# Altium PCB BACK-LIGHT.PcbDoc
Units mm, origin at the board's own origin, x right, y up, seen from the top; angles counter-clockwise.
Board outline 91 x 91 mm, 2 copper layers (Top Layer, Bottom Layer), stack 1.571 mm thick; 36 components, 34 nets, 79 pads, 6 vias.
Unrouted connection lines stored in the file: 1.
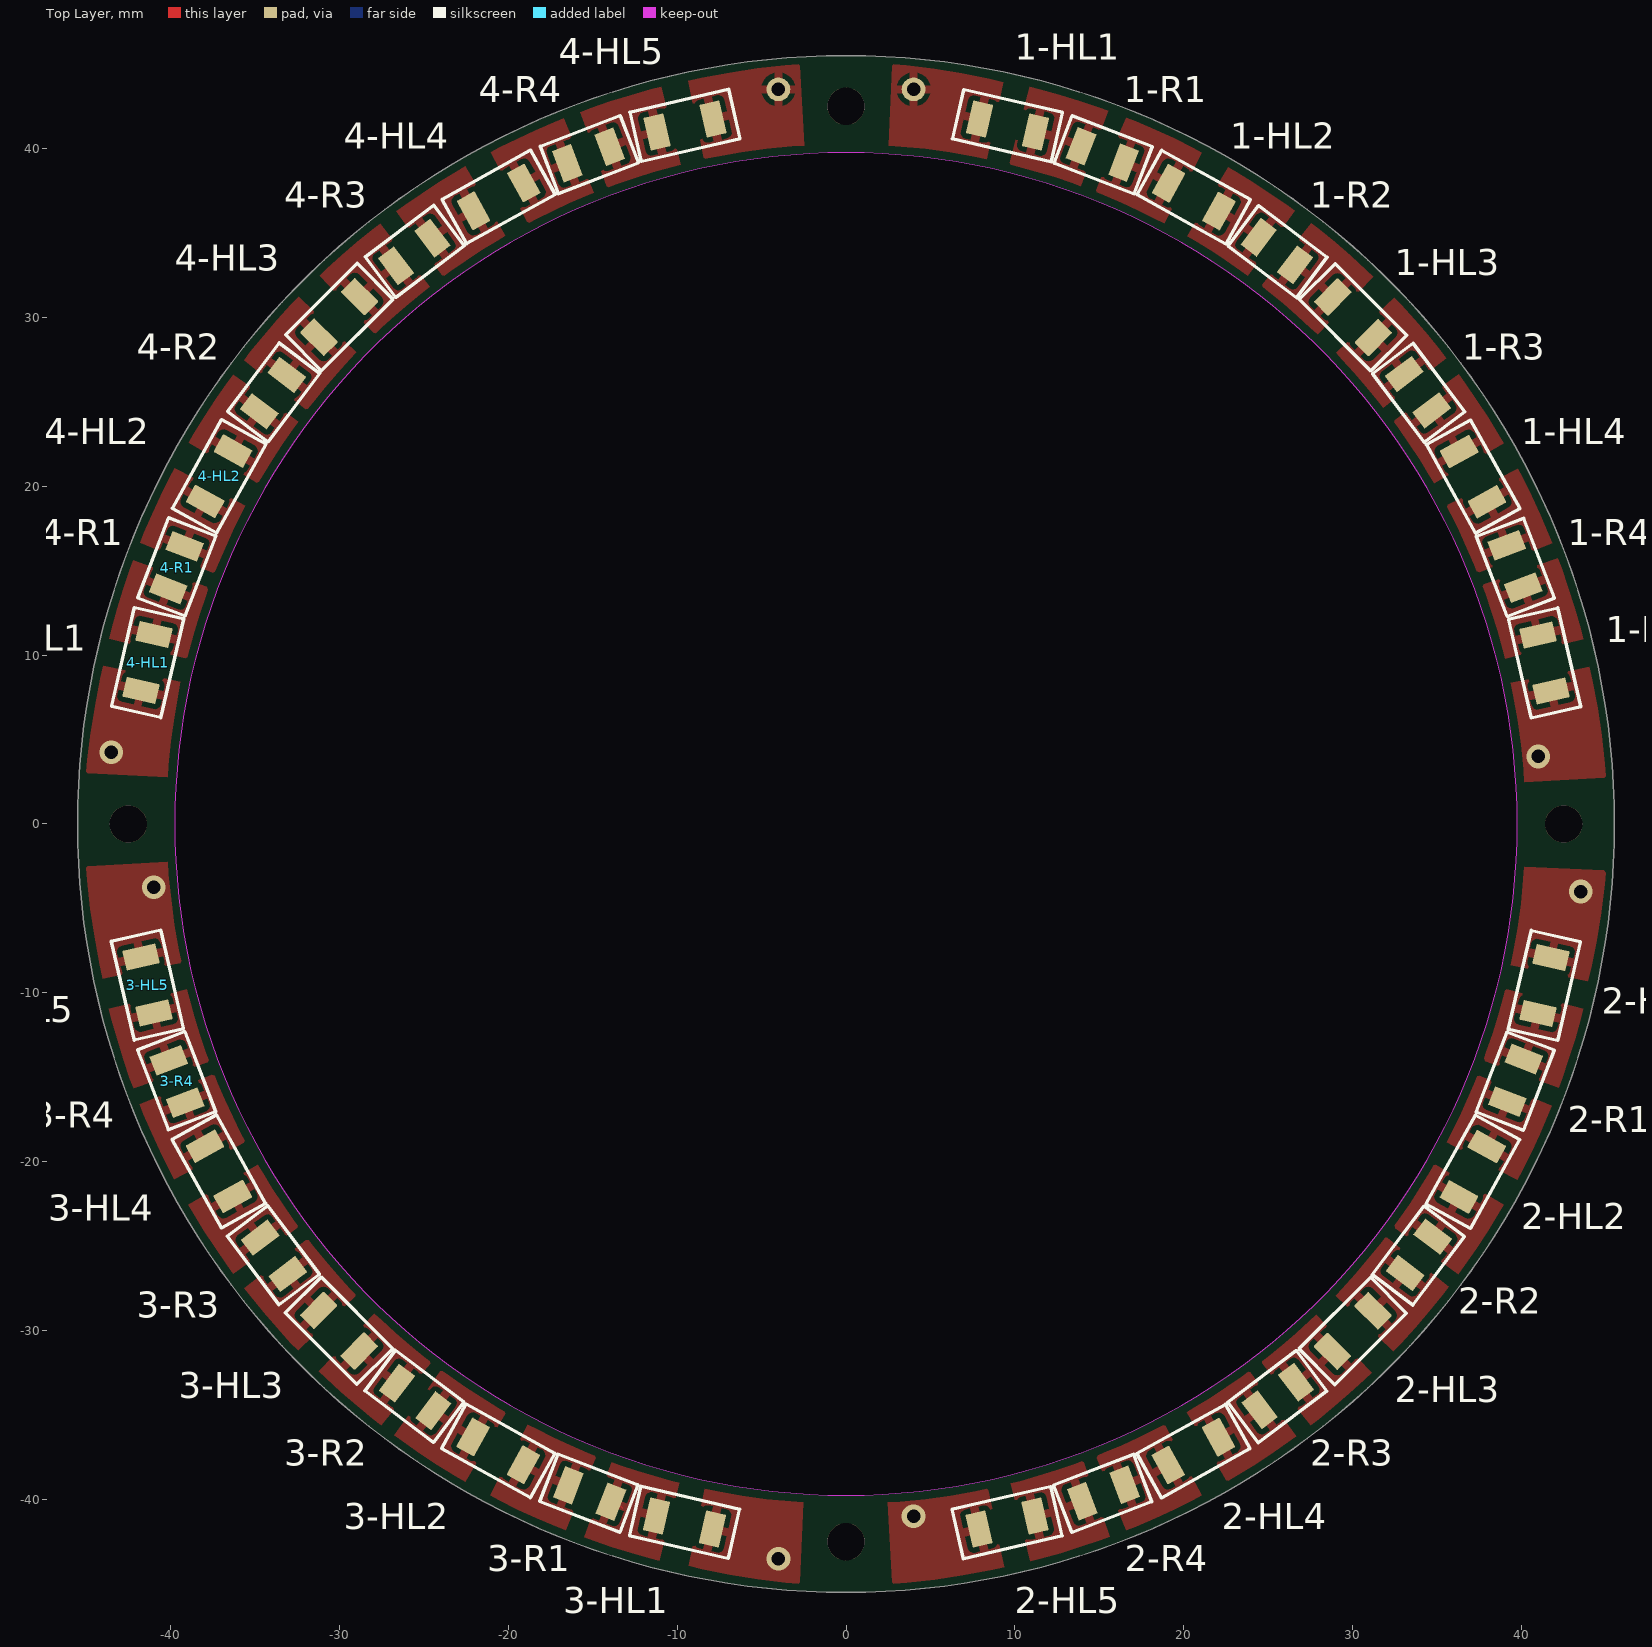
[diagram p0: Top Layer view]
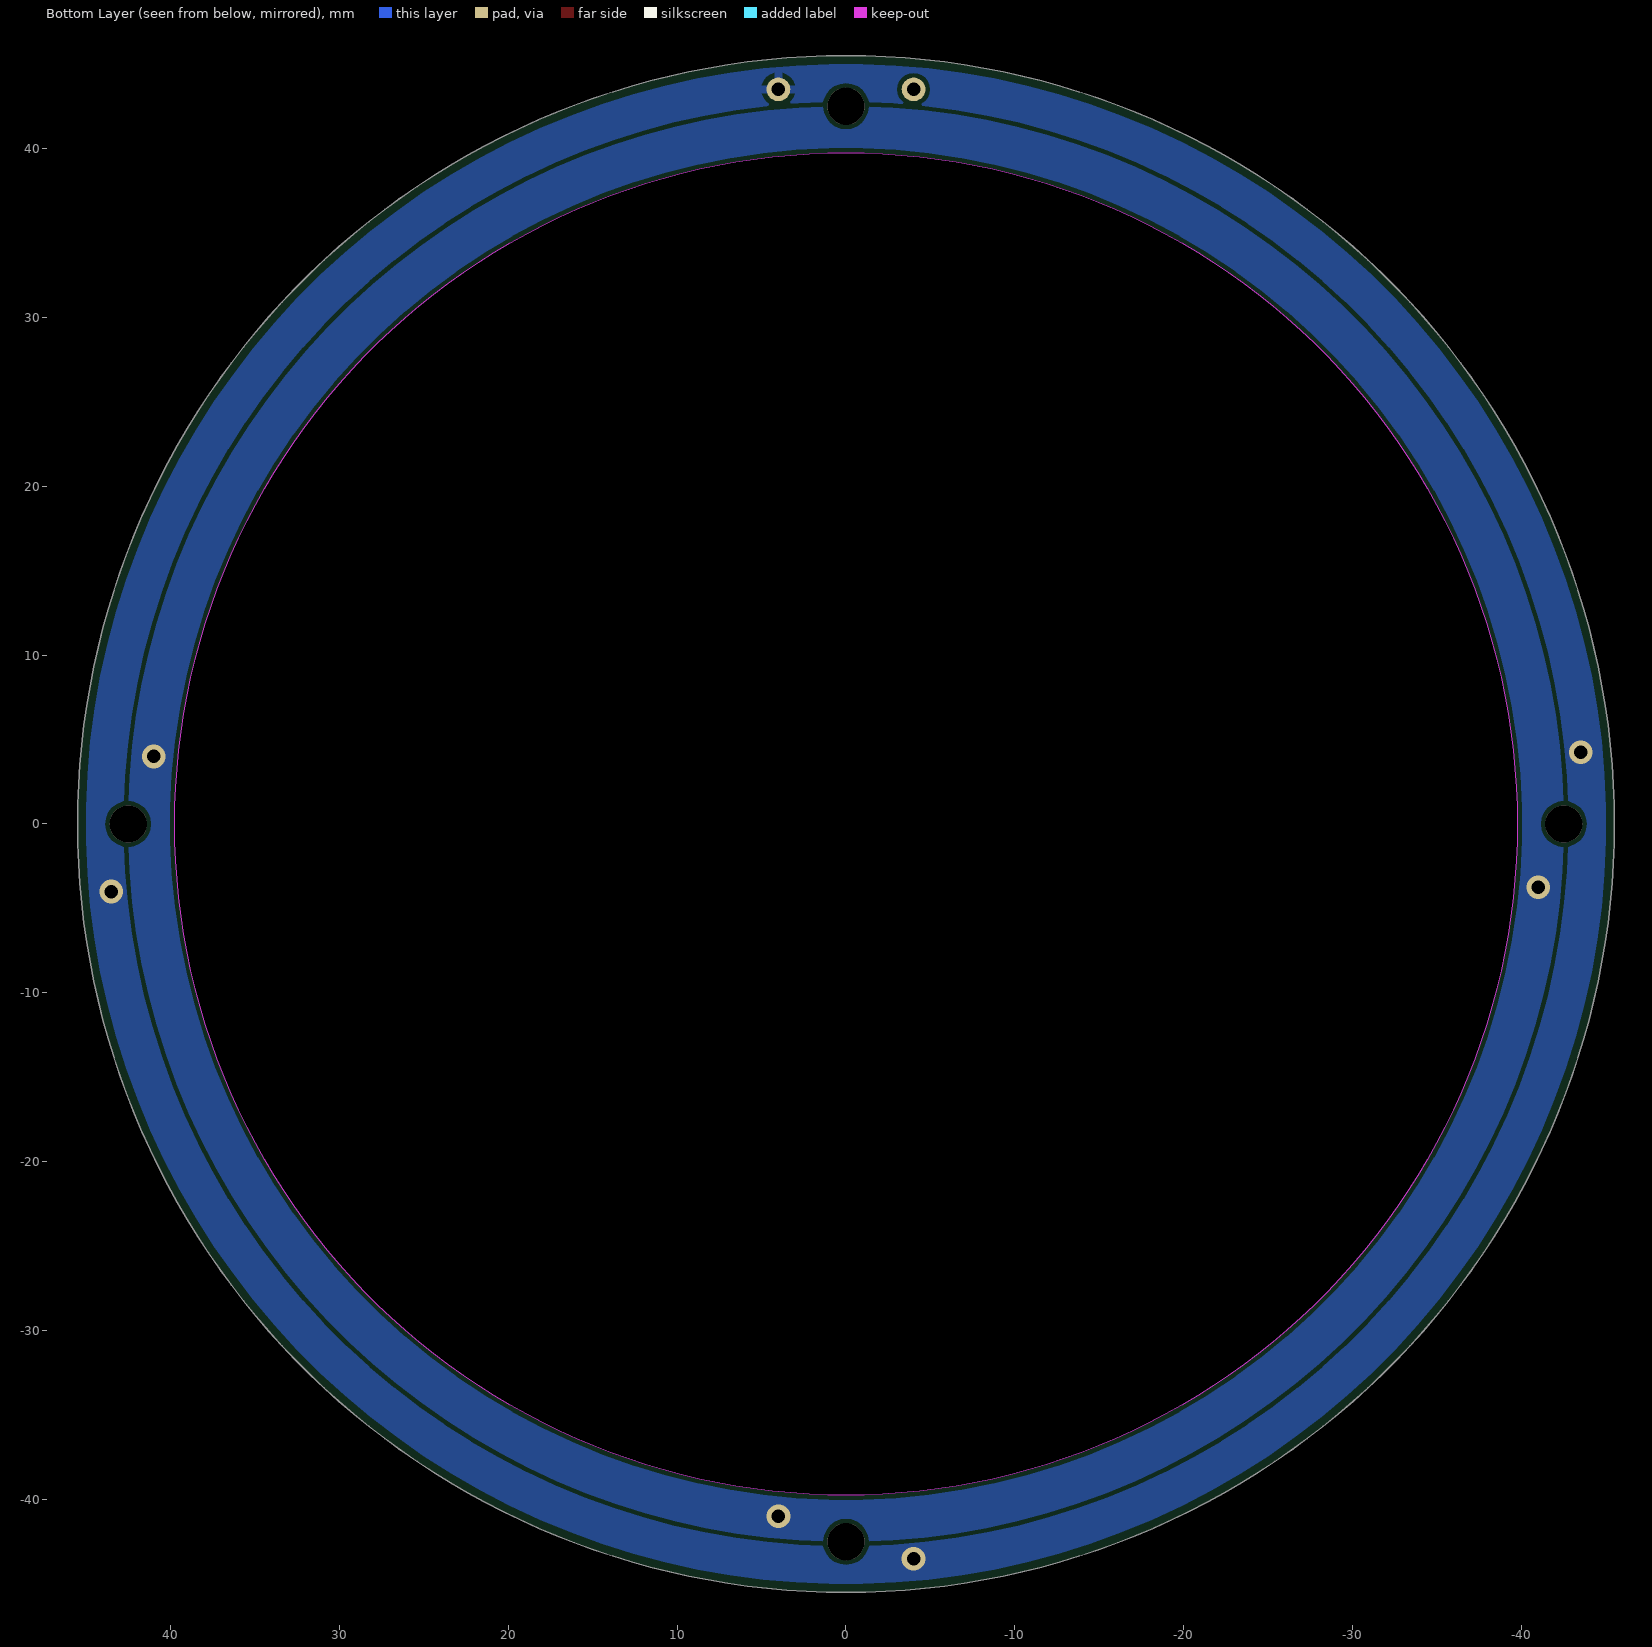
[diagram p1: Bottom Layer view, seen from below]
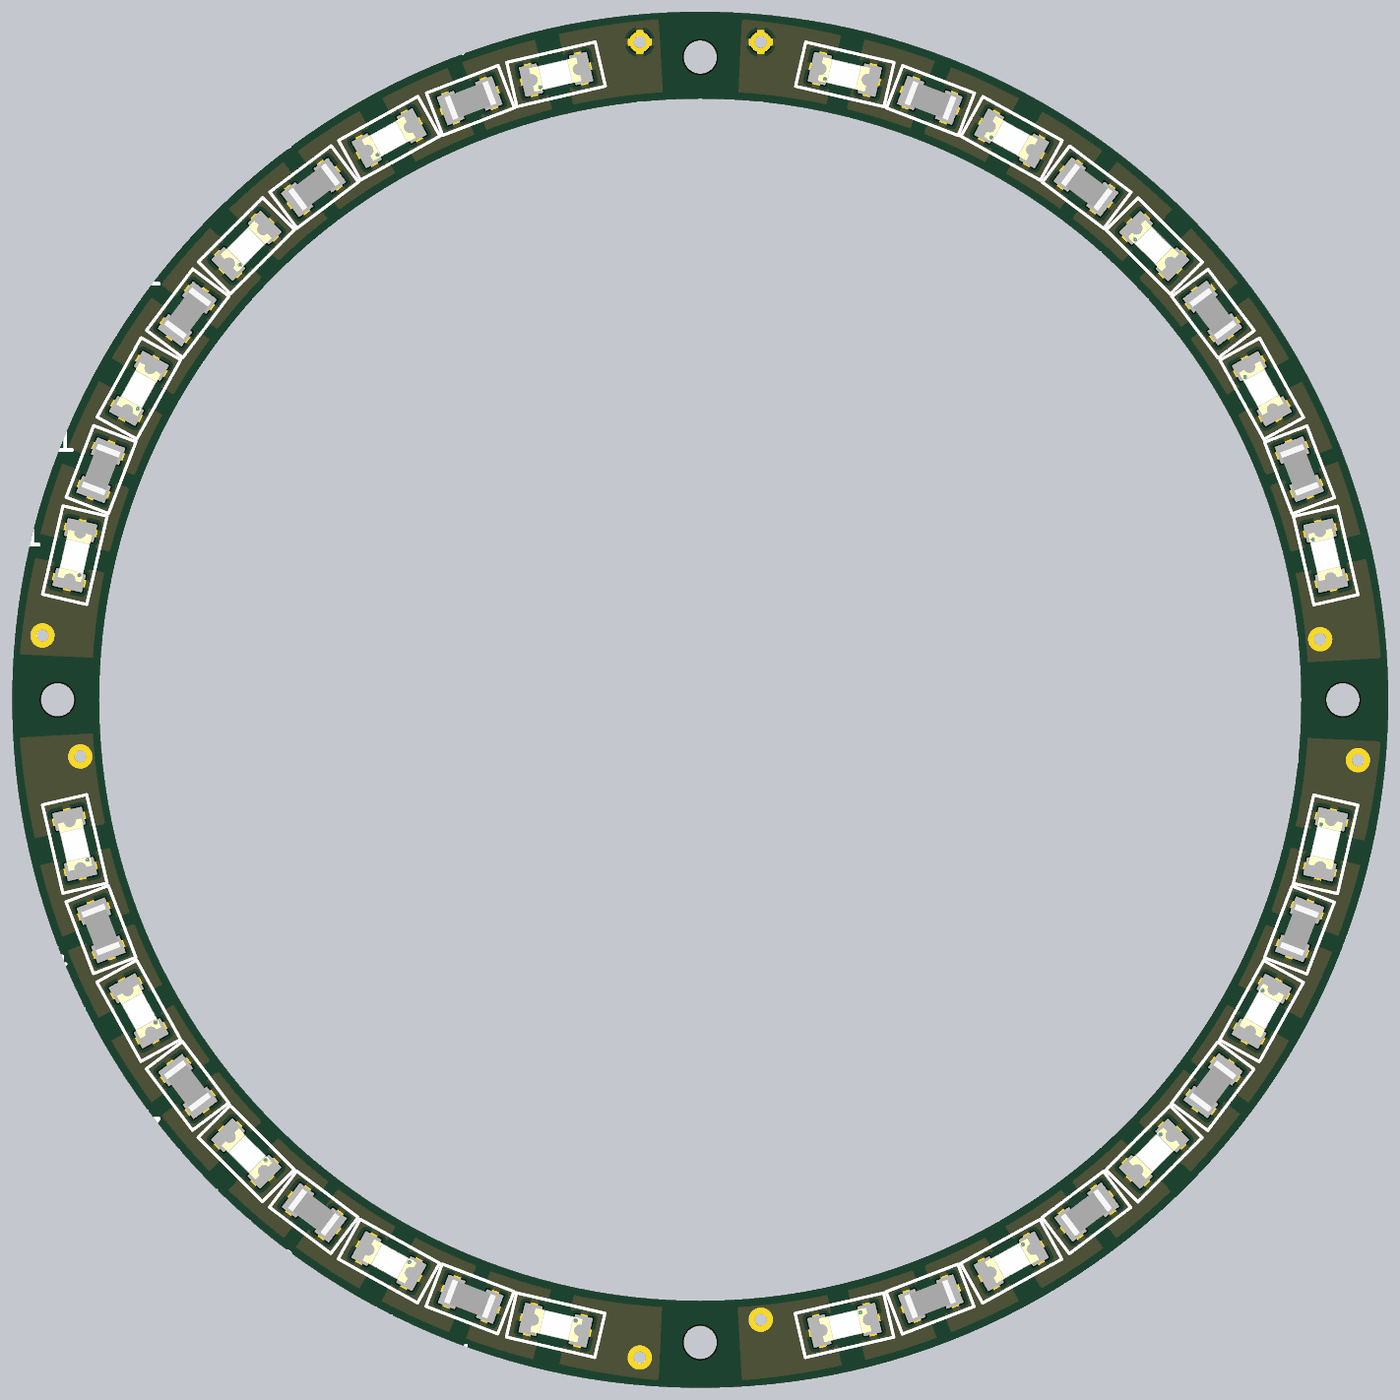
[diagram p2: 3D render of the assembled board from above, using the file's embedded part models]

## Layer stack, top to bottom
Top Solder: solder mask 0.0102, Solder Resist, Dk 3.5
Top Layer: signal copper 0.0356
Dielectric 1: dielectric 1.5, FR-4, Dk 4.8
Bottom Layer: signal copper 0.0356
Bottom Solder: solder mask 0.0102, Solder Resist, Dk 3.5

## Board outline
-45.5,0 ccw(c0,0) 0,-45.5 ccw(c0,0) 45.5,0 ccw(c0,0) 0,45.5 ccw(c0,0)
cut-out: -39.75,0 ccw(c0,0) 0,-39.75 ccw(c0,0) 39.75,0 ccw(c0,0) 0,39.75 ccw(c0,0)

## Design rules (kind name [scope] priority, off if disabled: settings)
Clearance [All] p1: gap=0.254 ignorepadtopadclearanceinfootprint=FALSE except(0: Arc-Hole Track-Hole SMDPad-Hole THPad-Hole Via-Hole Fill-Hole Poly-Hole Region-Hole Text-Hole)
PlaneConnect [All] p1: planeconnectstyle=Direct reliefexpansion=0.508 reliefentries=4 reliefconductorwidth=0.254 reliefairgap=0.254
PolygonConnect PolygonConnect_1 [ISVIA] p1: connectstyle=Direct reliefconductorwidth=0.254 reliefentries=4 polygonreliefangle="90 Angle" airgapwidth=0.254
PolygonConnect [All] p2: connectstyle=Relief reliefconductorwidth=0.5 reliefentries=4 polygonreliefangle="90 Angle" airgapwidth=0.3
RoutingVias [All] p1: holewidth=0.8 width=1.5 viastyle="Through Hole" minholewidth=0.8 minwidth=1.5 maxholewidth=0.8 maxwidth=1.5
SolderMaskExpansion [All] p1: expansion=0.102
Width [All] p1: maxlimit=1 minlimit=0.2 preferedwidth=0.5
29 further rules are at their usual default settings.

## Components (designator, comment, footprint, x,y, rotation, side; value= is the part's Value field where it differs from the comment)
1-HL1 "FYLS-1206UWC" "LED 1206" 9.562,41.359 r347 top value=3K*
1-HL2 "FYLS-1206UWC" "LED 1206" 20.592,37.121 r331 top value=3K*
1-HL3 "FYLS-1206UWC" "LED 1206" 30.026,30.007 r315 top value=3K*
1-HL4 "FYLS-1206UWC" "LED 1206" 37.134,20.568 r299 top value=3K*
1-HL5 "FYLS-1206UWC" "LED 1206" 41.365,9.536 r283 top value=3K*
1-R1 "3K*" RC1206 15.225,39.626 r339 top
1-R2 "3K*" RC1206 25.558,33.894 r323 top
1-R3 "3K*" RC1206 33.91,25.536 r307 top
1-R4 "3K*" RC1206 39.635,15.2 r291 top
2-HL1 "FYLS-1206UWC" "LED 1206" 41.359,-9.562 r257 top value=3K*
2-HL2 "FYLS-1206UWC" "LED 1206" 37.121,-20.592 r241 top value=3K*
2-HL3 "FYLS-1206UWC" "LED 1206" 30.007,-30.026 r225 top value=3K*
2-HL4 "FYLS-1206UWC" "LED 1206" 20.568,-37.134 r209 top value=3K*
2-HL5 "FYLS-1206UWC" "LED 1206" 9.536,-41.365 r193 top value=3K*
2-R1 "3K*" RC1206 39.626,-15.225 r249 top
2-R2 "3K*" RC1206 33.894,-25.558 r233 top
2-R3 "3K*" RC1206 25.536,-33.91 r217 top
2-R4 "3K*" RC1206 15.2,-39.635 r201 top
3-HL1 "FYLS-1206UWC" "LED 1206" -9.562,-41.359 r167 top value=3K*
3-HL2 "FYLS-1206UWC" "LED 1206" -20.592,-37.121 r151 top value=3K*
3-HL3 "FYLS-1206UWC" "LED 1206" -30.026,-30.007 r135 top value=3K*
3-HL4 "FYLS-1206UWC" "LED 1206" -37.134,-20.568 r119 top value=3K*
3-HL5 "FYLS-1206UWC" "LED 1206" -41.365,-9.536 r103 top value=3K*
3-R1 "3K*" RC1206 -15.225,-39.626 r159 top
3-R2 "3K*" RC1206 -25.558,-33.894 r143 top
3-R3 "3K*" RC1206 -33.91,-25.536 r127 top
3-R4 "3K*" RC1206 -39.635,-15.2 r111 top
4-HL1 "FYLS-1206UWC" "LED 1206" -41.359,9.562 r77 top value=3K*
4-HL2 "FYLS-1206UWC" "LED 1206" -37.121,20.592 r61 top value=3K*
4-HL3 "FYLS-1206UWC" "LED 1206" -30.007,30.026 r45 top value=3K*
4-HL4 "FYLS-1206UWC" "LED 1206" -20.568,37.134 r29 top value=3K*
4-HL5 "FYLS-1206UWC" "LED 1206" -9.536,41.365 r13 top value=3K*
4-R1 "3K*" RC1206 -39.626,15.225 r69 top
4-R2 "3K*" RC1206 -33.894,25.558 r53 top
4-R3 "3K*" RC1206 -25.536,33.91 r37 top
4-R4 "3K*" RC1206 -15.2,39.635 r21 top

## Footprints (in the part's own frame and the unit in brackets; to place one, negate y for a bottom-side part, rotate by r counter-clockwise, add the part's x,y. Pads: shape width x height; smd on the part's side, far side on the other; paste and mask are expansions set on the pad)
"LED 1206" [mm] "Chip Resistor, 2-Leads, Body 6,30x3,20mm, IPC Low Density"
  rrect10% 1.2x2 smd: 1(-1.7,0) 2(1.7,0)
  silkscreen extent -3,-1.5 3,1.5, body extent -1.65,-0.81 1.55,0.79, height 1.1
RC1206 [mm] "Chip Resistor, 2-Leads, Body 6,30x3,20mm, IPC Low Density"
  rrect3% 1.2x2 smd: 1(-1.4,0) 2(1.3,0)
  silkscreen extent -2.54,-1.5 2.54,1.5, body extent -1.53,-0.8 1.53,0.8, height 0.5

## Part data
1-HL1 1-HL2 1-HL3 1-HL4 1-HL5 2-HL1 2-HL2 2-HL3 2-HL4 2-HL5 3-HL1 3-HL2 3-HL3 3-HL4 3-HL5 4-HL1 4-HL2 4-HL3 4-HL4 4-HL5: library part LED, "Светодиод", Manufacturer=3K*, ManufacturerPartNumber=3K*, Part Number=3K*, Power/Voltage=3K*, Rem=3K*, TKE=3K*, Tolerance=3K*, Корпус=3K*, Примечание=3K*
1-R1 1-R2 1-R3 1-R4 2-R1 2-R2 2-R3 2-R4 3-R1 3-R2 3-R3 3-R4 4-R1 4-R2 4-R3 4-R4: library part RES, "Постоянный углеродистый резистор", Manufacturer=3K*, ManufacturerPartNumber=3K*, Part Number=3K*, Power/Voltage=3K*, Rem=3K*, TKE=3K*, Tolerance=3K*, Type=3K*

## Free pads (board coordinates)
  round 1.4 hole 0.8: 8(-4,43.5) 8(4,43.5)
  round 2.2 hole 2.2 unplated: MH(-42.5,0) MH(0,-42.5) MH(0,42.5) MH(0,42.5) MH(42.5,0)

## Via types
v1: diameter 1.4, hole 0.8, Top Layer to Bottom Layer, 6 vias

## Nets (pads, with @x,y where several pads share a name; then routed paths per layer and width w, separated by ;. In a path a pad name is that pad's centre, name@x,y a point inside that pad or via, vN(x,y) a via of type N, cw(c..) or ccw(c..) an arc to the next point about the centre after c; other vN are vias at no path point)
L+: 1-HL1.1 2-HL1.1 3-HL1.1 4-HL1.1 pad.8@4,43.5
  other v1: -4,-43.5 43.5,-4 -43.5,4.25
L-: 1-HL5.2 2-HL5.2 3-HL5.2 4-HL5.2 pad.8@-4,43.5
  other v1: 4,-41 -41,-3.75 41,4
Net1-HL1_2: 1-HL1.2 1-R1.1
Net1-HL2_1: 1-HL2.1 1-R1.2
Net1-HL2_2: 1-HL2.2 1-R2.1
Net1-HL3_1: 1-HL3.1 1-R2.2
Net1-HL3_2: 1-HL3.2 1-R3.1
Net1-HL4_1: 1-HL4.1 1-R3.2
Net1-HL4_2: 1-HL4.2 1-R4.1
Net1-HL5_1: 1-HL5.1 1-R4.2
Net2-HL1_2: 2-HL1.2 2-R1.1
Net2-HL2_1: 2-HL2.1 2-R1.2
Net2-HL2_2: 2-HL2.2 2-R2.1
Net2-HL3_1: 2-HL3.1 2-R2.2
Net2-HL3_2: 2-HL3.2 2-R3.1
Net2-HL4_1: 2-HL4.1 2-R3.2
Net2-HL4_2: 2-HL4.2 2-R4.1
Net2-HL5_1: 2-HL5.1 2-R4.2
Net3-HL1_2: 3-HL1.2 3-R1.1
Net3-HL2_1: 3-HL2.1 3-R1.2
Net3-HL2_2: 3-HL2.2 3-R2.1
Net3-HL3_1: 3-HL3.1 3-R2.2
Net3-HL3_2: 3-HL3.2 3-R3.1
Net3-HL4_1: 3-HL4.1 3-R3.2
Net3-HL4_2: 3-HL4.2 3-R4.1
Net3-HL5_1: 3-HL5.1 3-R4.2
Net4-HL1_2: 4-HL1.2 4-R1.1
Net4-HL2_1: 4-HL2.1 4-R1.2
Net4-HL2_2: 4-HL2.2 4-R2.1
Net4-HL3_1: 4-HL3.1 4-R2.2
Net4-HL3_2: 4-HL3.2 4-R3.1
Net4-HL4_1: 4-HL4.1 4-R3.2
Net4-HL4_2: 4-HL4.2 4-R4.1
Net4-HL5_1: 4-HL5.1 4-R4.2

## Polygon pours and split planes (outlines as drawn)
L+ on Top Layer (solid, pour order 94): -9.314,-43.927 ccw(c1.615,2.316) -2.75,-45 -2.527,-40.171 cw(c-0.001,-0.01) -8.355,-39.373
L- on Top Layer (solid, pour order 100): 45,2.75 ccw(c-1.638,-0.846) 44.023,9.31 39.371,8.363 cw(c0.008,0.001) 40.174,2.476
L+ on Top Layer (solid, pour order 98): 43.927,-9.314 ccw(c-2.315,1.615) 45,-2.75 40.171,-2.527 cw(c0.011,-0.001) 39.373,-8.355
L- on Top Layer (solid, pour order 96): 2.75,-45 ccw(c-0.846,1.639) 9.363,-44.011 8.416,-39.36 cw(c0.001,-0.007) 2.476,-40.174
L- on Top Layer (solid, pour order 92): -45,-2.5 ccw(c1.64,1.096) -44,-9.161 -39.35,-8.215 cw(c-0.006,0.249) -40.174,-2.226
L+ on Top Layer (solid, pour order 90): -43.971,9.376 ccw(c2.315,-1.365) -45,3 -40.171,2.777 cw(c-0.01,0.251) -39.413,8.416
L+ on Top Layer (solid, pour order 88): 9.301,43.93 ccw(c-1.615,-2.315) 2.75,45 2.527,40.171 cw(c0.001,0.011) 8.342,39.376
L- on Top Layer (solid, pour order 86): -2.75,45 ccw(c0.846,-1.638) -9.354,44.013 -8.408,39.362 cw(c-0.001,0.007) -2.476,40.174
Net4-HL1_2 on Top Layer "Top Layer-Net3-HL1_2" (solid, pour order 78): -42.203,15.617 ccw(c0,0) -43.64,10.98 -39.041,9.791 cw(c-0.002,0) -37.737,13.998
Net4-HL2_1 on Top Layer "Top Layer-No Net" (solid, pour order 76): -39.759,21.076 ccw(c-0.005,0.003) -41.802,16.661 -37.413,14.843 cw(c-0.002,0.001) -35.562,18.852
Net4-HL2_2 on Top Layer (solid, pour order 74): -36.287,26.614 ccw(c-0.005,0.004) -38.921,22.587 -34.828,20.176 cw(c-0.002,0.001) -32.44,23.826
Net4-HL3_1 on Top Layer (solid, pour order 72): -32.409,31.219 ccw(c-0.005,0.004) -35.647,27.464 -31.93,24.506 cw(c-0.002,0.002) -28.988,27.924
Net4-HL3_2 on Top Layer (solid, pour order 70): -27.579,35.558 ccw(c-0.005,0.006) -31.17,32.456 -27.901,29.011 cw(c-0.003,0.003) -24.65,31.819
Net4-HL4_1 on Top Layer (solid, pour order 68): -22.549,38.943 ccw(c-0.004,0.007) -26.626,36.277 -23.868,32.41 cw(c-0.002,0.002) -20.169,34.832
Net4-HL4_2 on Top Layer (solid, pour order 66): -16.715,41.78 ccw(c-0.005,0.011) -21.028,39.785 -18.835,35.571 cw(c-0.002,0.004) -14.93,37.378
Net4-HL5_1 on Top Layer (solid, pour order 64): -10.941,43.65 ccw(c-0.003,0.009) -15.734,42.16 -14.148,37.682 cw(c-0.001,0.003) -9.786,39.042
Net1-HL1_2 on Top Layer "Top Layer-Net3-HL1_2" (solid, pour order 62): 15.518,42.24 ccw(c0.001,0.004) 10.867,43.668 9.677,39.069 cw(c0.002,0.005) 13.899,37.774
Net1-HL2_1 on Top Layer "Top Layer-No Net" (solid, pour order 60): 21.079,39.758 ccw(c0.006,0.013) 16.593,41.829 14.775,37.44 cw(c0.004,0.01) 18.855,35.561
Net1-HL2_2 on Top Layer (solid, pour order 58): 26.585,36.307 ccw(c0.007,0.01) 22.63,38.896 20.219,34.803 cw(c0.004,0.006) 23.798,32.461
Net1-HL3_1 on Top Layer (solid, pour order 56): 31.219,32.409 ccw(c0.005,0.006) 27.555,35.577 24.598,31.859 cw(c0.002,0.003) 27.924,28.988
Net1-HL3_2 on Top Layer (solid, pour order 54): 35.558,27.579 ccw(c0.009,0.008) 32.463,31.164 29.017,27.894 cw(c0.009,0.008) 31.819,24.65
Net1-HL4_1 on Top Layer (solid, pour order 52): 38.943,22.549 ccw(c0.008,0.005) 36.277,26.626 32.41,23.868 cw(c0.004,0.002) 34.832,20.169
Net1-HL4_2 on Top Layer (solid, pour order 50): 41.813,16.634 ccw(c0.012,0.005) 39.776,21.044 35.563,18.851 cw(c0.008,0.004) 37.411,14.849
Net1-HL5_1 on Top Layer (solid, pour order 48): 43.65,10.941 ccw(c0.01,0.003) 42.155,15.747 37.676,14.162 cw(c0.004,0.001) 39.042,9.786
Net2-HL1_2 on Top Layer "Top Layer-Net3-HL1_2" (solid, pour order 46): 42.203,-15.617 ccw(c0.003,-0.001) 43.649,-10.944 39.05,-9.754 cw(c0.005,-0.002) 37.737,-13.998
Net2-HL2_1 on Top Layer "Top Layer-No Net" (solid, pour order 44): 39.759,-21.076 ccw(c0.006,-0.003) 41.794,-16.682 37.405,-14.864 cw(c0.004,-0.002) 35.562,-18.852
Net2-HL2_2 on Top Layer (solid, pour order 42): 36.254,-26.658 ccw(c0.007,-0.005) 38.94,-22.554 34.847,-20.143 cw(c0.002,-0.001) 32.407,-23.871
Net2-HL3_1 on Top Layer (solid, pour order 40): 32.409,-31.219 ccw(c0.005,-0.004) 35.696,-27.4 31.978,-24.443 cw(c0.002,-0.001) 28.988,-27.924
Net2-HL3_2 on Top Layer (solid, pour order 38): 27.512,-35.611 ccw(c0.006,-0.007) 31.124,-32.501 27.854,-29.056 cw(c0.005,-0.006) 24.582,-31.871
Net2-HL4_1 on Top Layer (solid, pour order 36): 22.557,-38.938 ccw(c0.005,-0.009) 26.648,-36.261 23.889,-32.394 cw(c0.003,-0.005) 20.176,-34.828
Net2-HL4_2 on Top Layer (solid, pour order 34): 16.599,-41.827 ccw(c0.004,-0.009) 21.069,-39.763 18.875,-35.55 cw(c0.001,-0.003) 14.814,-37.425
Net2-HL5_1 on Top Layer (solid, pour order 32): 10.916,-43.656 ccw(c0.002,-0.007) 15.632,-42.198 14.047,-37.719 cw(c0.001,-0.004) 9.761,-39.049
Net3-HL5_1 on Top Layer (solid, pour order 30): -43.65,-10.941 ccw(c-0.007,-0.002) -42.189,-15.655 -37.711,-14.07 cw(c-0.001,0) -39.042,-9.786
Net3-HL4_2 on Top Layer (solid, pour order 28): -41.831,-16.587 ccw(c-0.005,-0.002) -39.785,-21.028 -35.571,-18.835 cw(c0,0) -37.429,-14.802
Net3-HL4_1 on Top Layer (solid, pour order 26): -38.943,-22.549 ccw(c-0.005,-0.003) -36.277,-26.626 -32.41,-23.868 cw(c-0.001,-0.001) -34.832,-20.169
Net3-HL3_2 on Top Layer (solid, pour order 24): -35.627,-27.491 ccw(c-0.003,-0.002) -32.45,-31.177 -29.004,-27.907 cw(c-0.001,-0.001) -31.887,-24.562
Net3-HL3_1 on Top Layer (solid, pour order 22): -31.219,-32.409 ccw(c-0.003,-0.003) -27.527,-35.598 -24.57,-31.881 cw(c-0.001,-0.001) -27.924,-28.988
Net3-HL2_2 on Top Layer (solid, pour order 20): -26.748,-36.188 ccw(c-0.003,-0.004) -22.554,-38.94 -20.143,-34.847 cw(c-0.001,-0.002) -23.961,-32.341
Net3-HL2_1 on Top Layer "Top Layer-No Net" (solid, pour order 18): -21.076,-39.759 ccw(c-0.002,-0.004) -16.609,-41.823 -14.791,-37.434 cw(c-0.001,-0.003) -18.852,-35.562
Net3-HL1_2 on Top Layer "Top Layer-Net3-HL1_2" (solid, pour order 4): -15.496,-42.248 ccw(c0,-0.001) -11.057,-43.62 -9.868,-39.022 cw(c0.001,0.003) -13.877,-37.782
no net on Top Layer "Top Layer-No Net 1" (solid, pour order 2): -13.75,-40 -13.25,-40.5
L+ on Bottom Layer "L+_L02_P084" (solid, pour order 84): -45,0 ccw(c0,0) 0,-45 ccw(c0,0) 45,0 ccw(c0,0) 0,45 ccw(c0,0)
L- on Bottom Layer "L-_L02_P082" (solid, pour order 82): -42.5,0 ccw(c0,0) 0,-42.5 ccw(c0,0) 42.5,0 ccw(c0,0) 0,42.5 ccw(c0,0)

## Silkscreen, mask and mechanical layers (free items; w line width, h text height)
Mechanical 4:
  circle w0.1: c0,0 r39.75
  circle w0.1: c0,0 r45.5